# Altium PCB PlacaPrincipal.PcbDoc
Units mil, origin at the board's own origin, x right, y up, seen from the top; angles counter-clockwise.
Board outline 3660.03 x 3280.03 mil, 2 copper layers (Top Layer, Bottom Layer); 43 components, 37 nets, 147 pads, 144 vias.
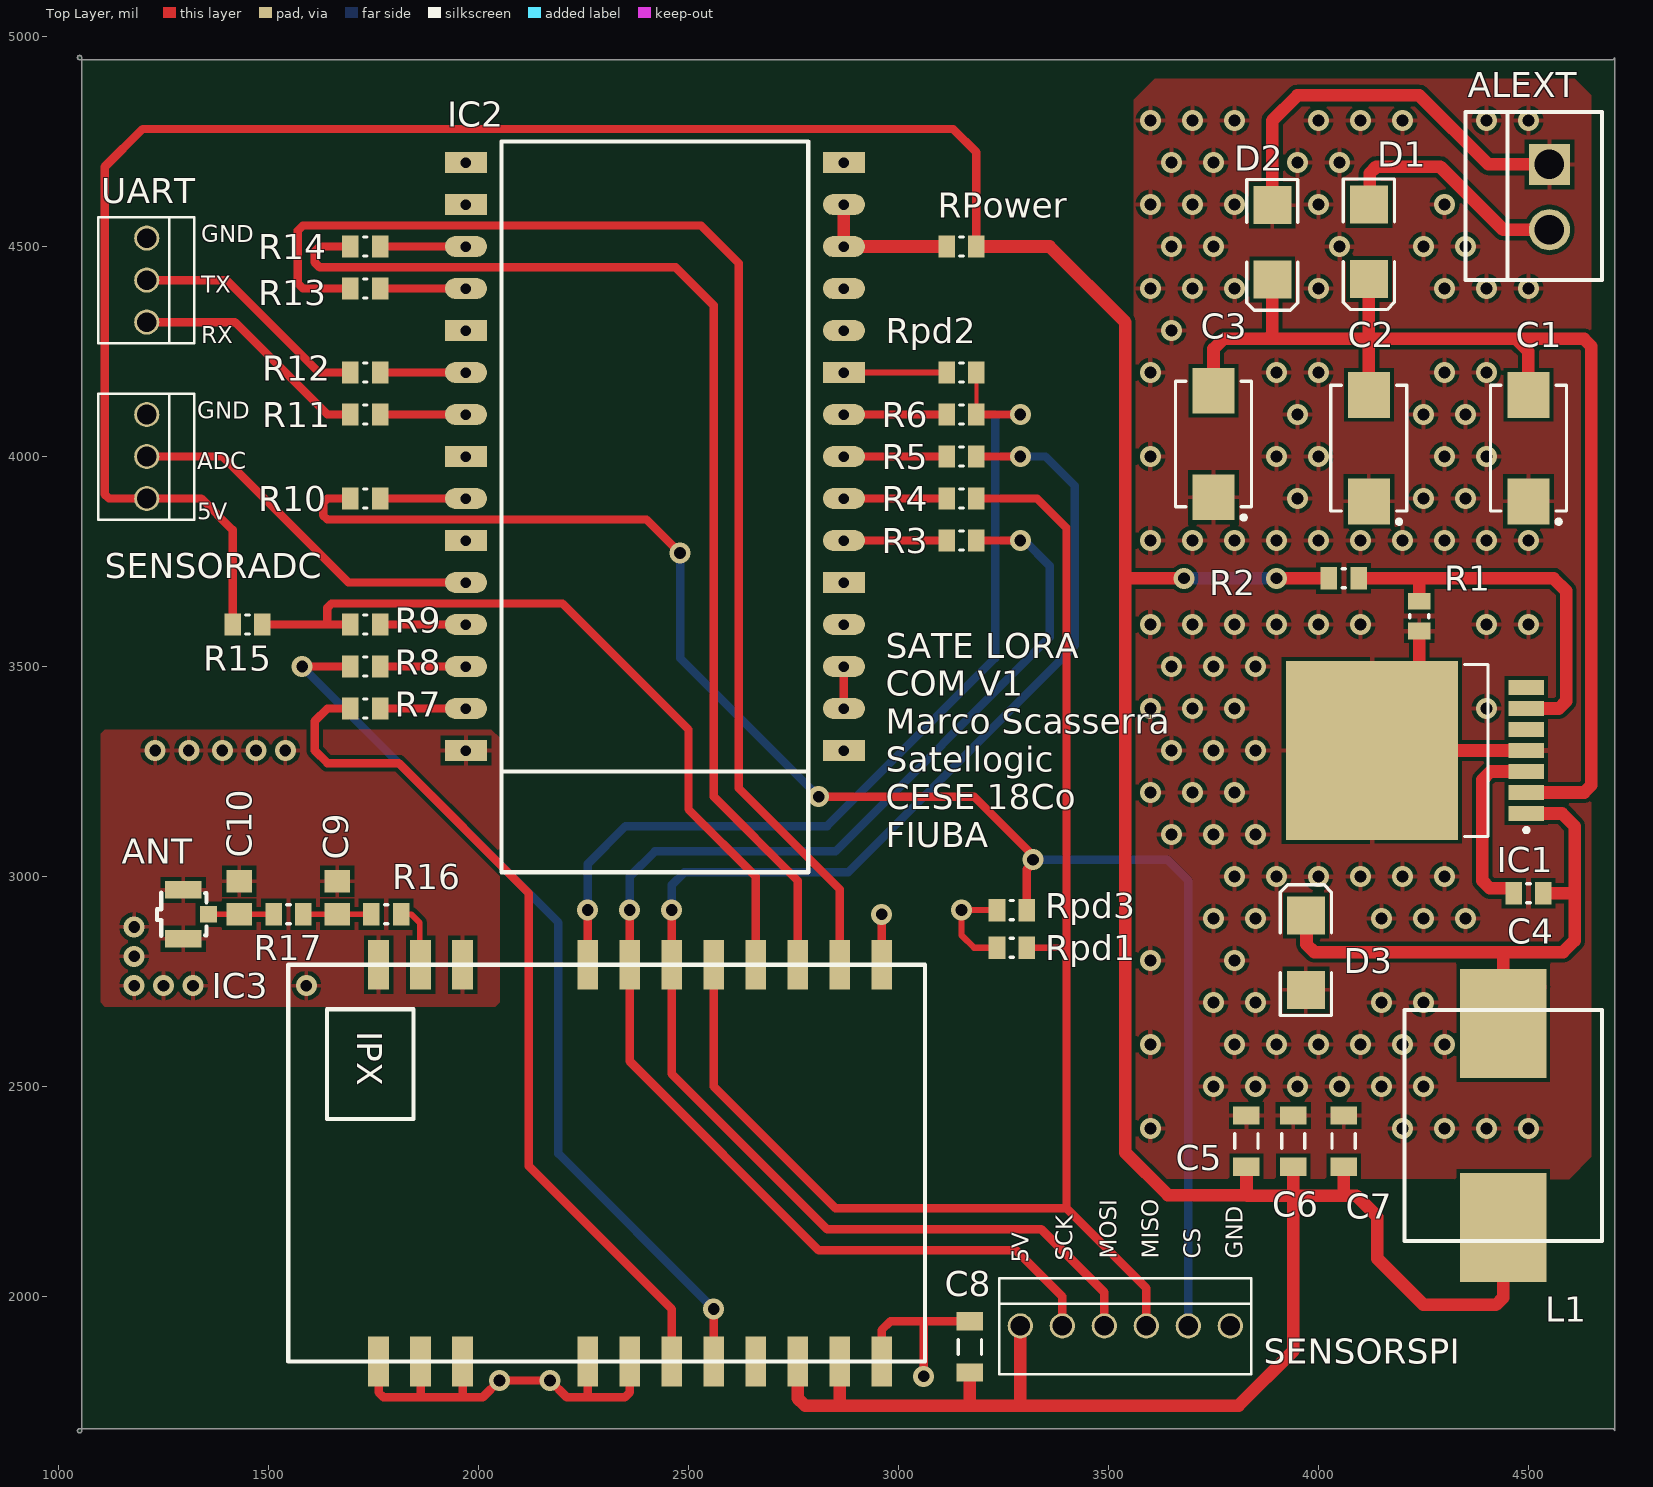
[diagram p0: Top Layer view]
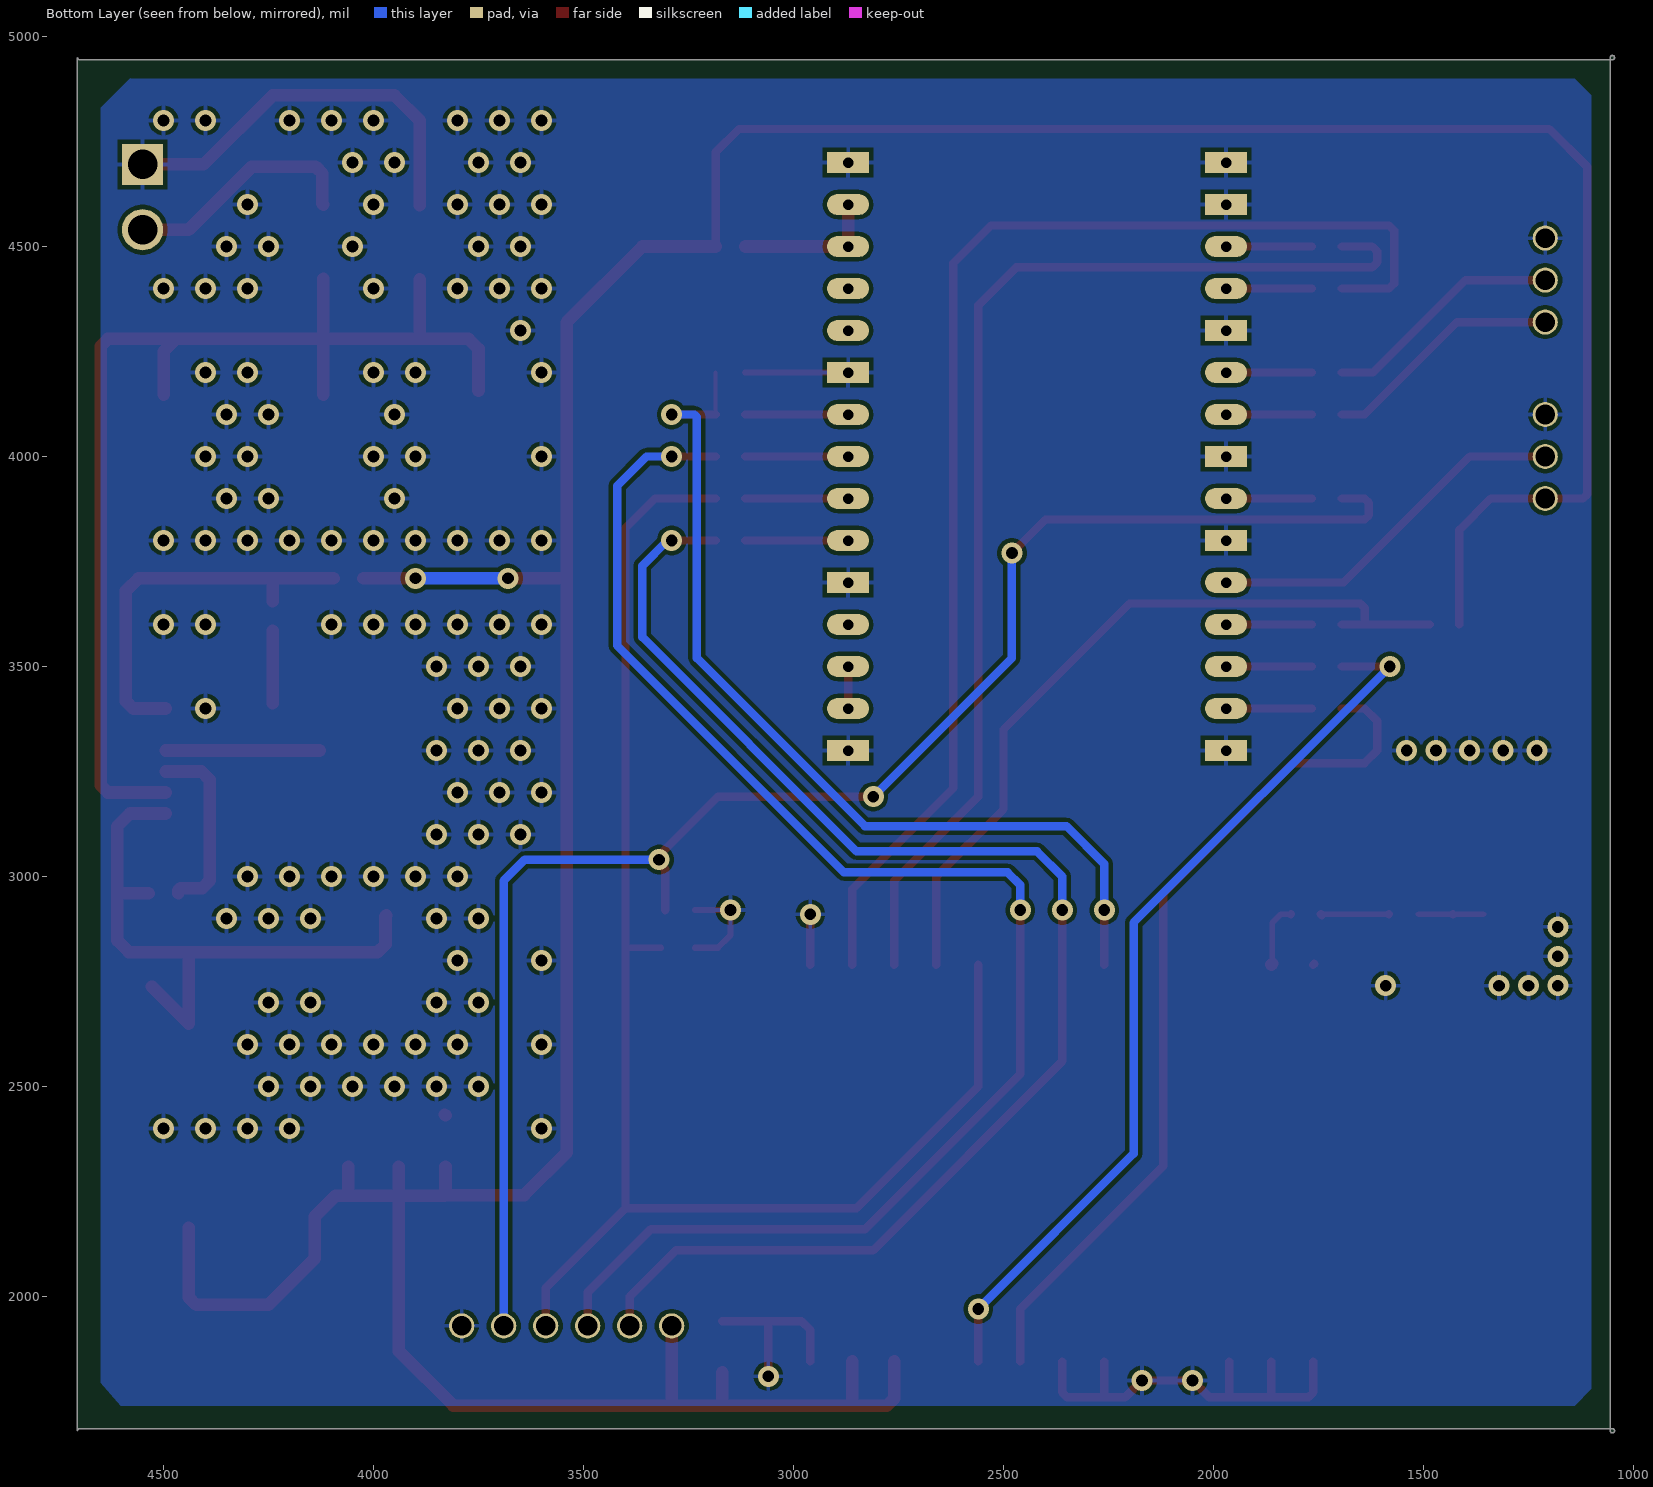
[diagram p1: Bottom Layer view, seen from below]
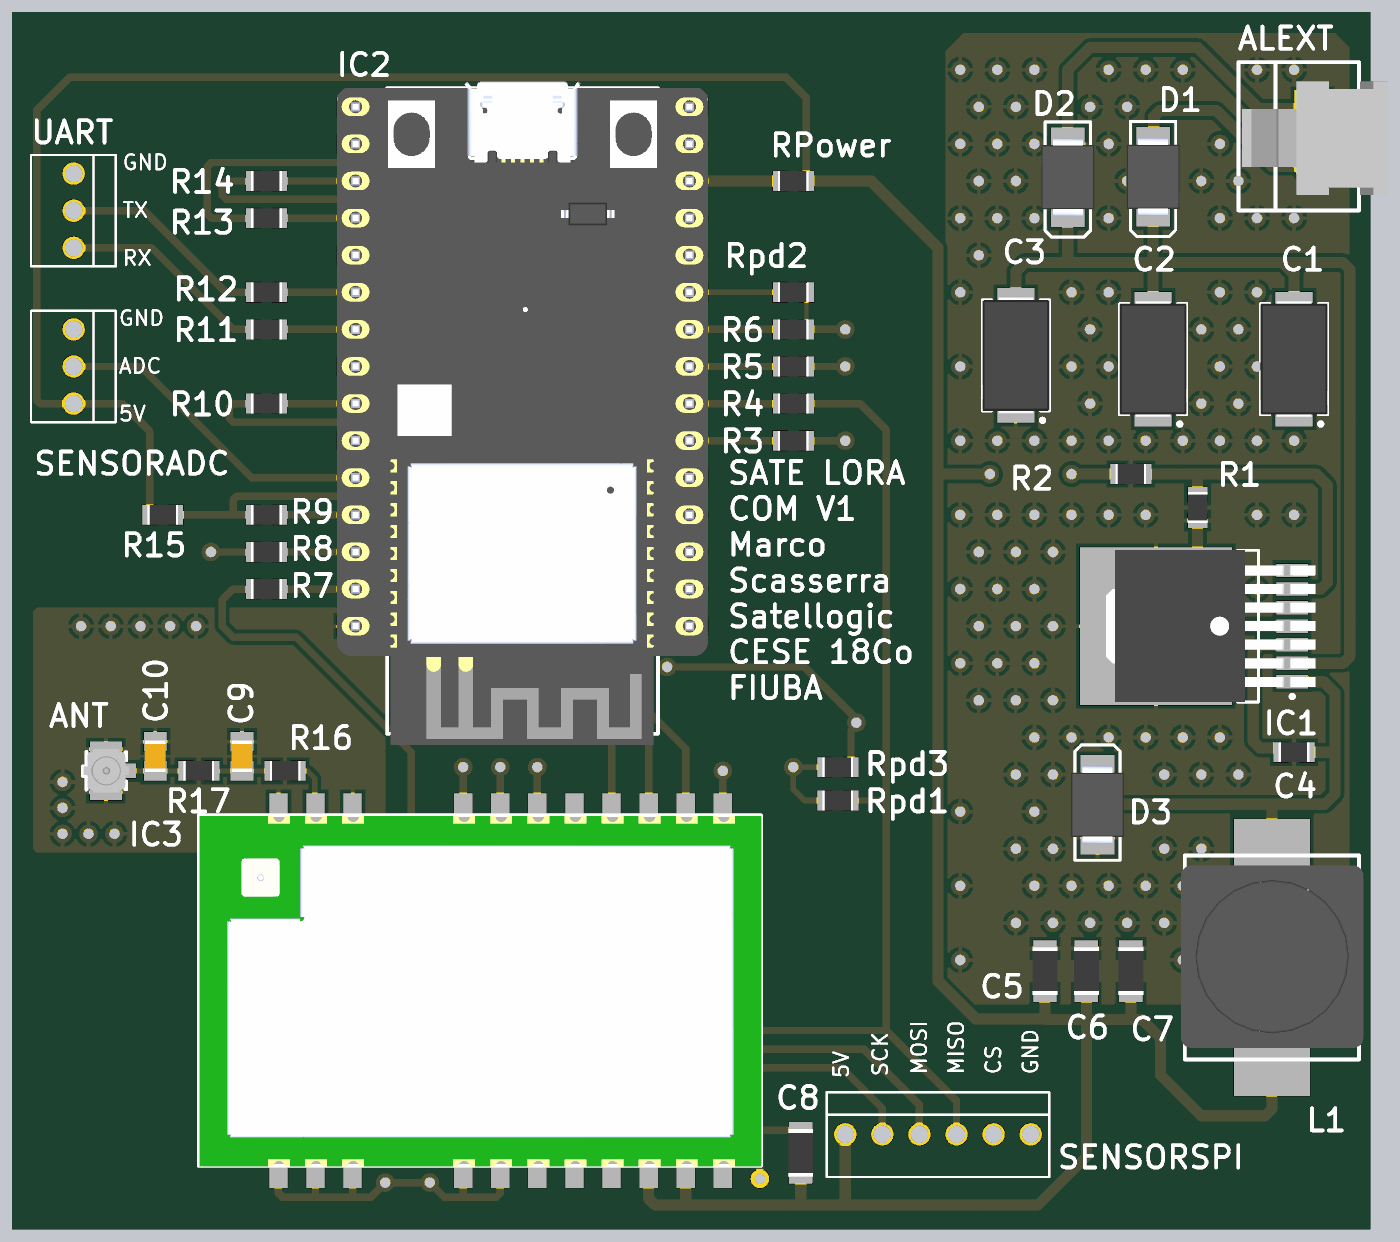
[diagram p2: 3D render of the assembled board from above, using the file's embedded part models]

## Layer stack, top to bottom
Top Solder: solder mask 0.4, Solder Resist, Dk 3.5
Top Layer: signal copper 1.4
Dielectric 1: dielectric 12.6, FR-4, Dk 4.8
Bottom Layer: signal copper 1.4
Bottom Solder: solder mask 0.4, Solder Resist, Dk 3.5

## Board outline
1044.98,1680 cw(c1050,1680) 1050,1685.02 4700,1685.02 cw(c4700,1680) 4705.02,1680 4705.02,4950 cw(c4700,4950) 4700,4944.98 1050,4944.98 cw(c1050,4950) 1044.98,4950 cw(c1050,4950) 1050,4955.02 cw(c1050,4950) 1055.02,4950 1055.02,1680 cw(c1050,1680) 1050,1674.98 cw(c1050,1680)

## Design rules (kind name [scope] priority, off if disabled: settings)
Clearance [All] p1: gap=10 ignorepadtopadclearanceinfootprint=FALSE
MinimumSolderMaskSliver [All] p1: minsoldermaskwidth=3.94
PolygonConnect [All] p1: connectstyle=Relief reliefconductorwidth=10 reliefentries=4 polygonreliefangle="90 Angle" airgapwidth=10
RoutingVias [All] p1: holewidth=28 width=50 viastyle="Through Hole" minholewidth=28 minwidth=50 maxholewidth=28 maxwidth=50
SilkToSolderMaskClearance [IsPad] p1: minsilkscreentomaskgap=5.91 clearancetoexposedcopper=TRUE
SolderMaskExpansion [All] p1: expansion=1.97 istentingtop=FALSE
Width [All] p1: maxlimit=30 minlimit=10 preferedwidth=10 minimp=50.000000 maximp=50.000000 favimp=50.000000
28 further rules are at their usual default settings.

## Classes and differential pairs
component class U_PowerSupply: ALEXT C1 C2 C3 C4 C5 C6 C7 D1 D2 D3 IC1 L1 R1 R2
component class U_LoRaModule: ANT C8 C9 C10 IC3 R15 R16 R17
component class U_Microcontroller: IC2 R3 R4 R5 R6 R7 R8 R9 R10 R11 R12 R13 R14 Rpd1 Rpd2 Rpd3 RPower SENSORADC SENSORSPI UART

## Components (designator, comment, footprint, x,y, rotation, side; value= is the part's Value field where it differs from the comment)
ALEXT "Header 2" "CONN HEADER VERT 2POS 3.96MM" 4550,4695.51 r0 top
ANT "Header 3" "IPEX Board Conn" 1352.09,2705.28 r90 top
C1 "Cap" "KEMET Case D" 4500,4020 r270 top value="47uF 35V"
C2 "Cap" "KEMET Case D" 4120,4020 r270 top value="47uF 35V"
C3 "Cap" "KEMET Case D" 3750,4030 r270 top value="47uF 35V"
C4 "Cap" RES0805 4500,2960 r0 top value=10nF
C5 "Cap" "RES 1206" 3828.58,2370 r270 top value="33uF 16V"
C6 "Cap" "RES 1206" 3940,2370 r270 top value="33uF 16V"
C7 "Cap" "RES 1206" 4060,2370 r270 top value="33uF 16V"
C8 "Cap" "RES 1206" 3170,1880 r270 top value="33uF 16V"
C9 "Cap" CAP0805 1663.69,2949.37 r270 top value=DNP
C10 "Cap" CAP0805 1430,2949.37 r270 top value=DNP
D1 "D Schottky" SMB 4120,4600 r270 top value=B340B-13-F
D2 "D Zener" SMB 3890,4598.58 r270 top value=SMBJ24A
D3 "D Schottky" SMB 3970,2730 r90 top value=B340B-13-F
IC1 "LM2676S-ADJ" DPAK127P1435X464-8N 4250,3300 r180 top
IC2 "ESP32-C3-DevKitC-02" ESP32-C3-DEVKITC-02 2870,3300 r180 top
IC3 "E22-900M30S" E22-900M30S 1547.01,2790 r270 top
L1 "RL-6050" RL-6050 4847,2541 r270 top value=22uH
R1 "Res2" RES0805 4240,3620 r90 top value="1K 1%"
R2 "Res2" RES0805 4060,3710 r180 top value="3K16 1%"
R3 "Res2" RES0805 3150,3800 r180 top value=0R
R4 "Res2" RES0805 3150,3900 r180 top value=0R
R5 "Res2" RES0805 3150,4000 r180 top value=0R
R6 "Res2" RES0805 3150,4100 r180 top value=0R
R7 "Res2" RES0805 1730,3400 r180 top value=0R
R8 "Res2" RES0805 1730,3500 r180 top value=0R
R9 "Res2" RES0805 1730,3600 r180 top value=0R
R10 "Res2" RES0805 1730,3900 r180 top value=0R
R11 "Res2" RES0805 1730,4100 r180 top value=470
R12 "Res2" RES0805 1730,4200 r180 top value=470
R13 "Res2" RES0805 1730,4400 r180 top value=0R
R14 "Res2" RES0805 1730,4500 r180 top value=0R
R15 "Res2" RES0805 1450,3600 r180 top value=10K
R16 "Res2" RES0805 1780,2910 r180 top value=DNP
R17 "Res2" RES0805 1547.38,2910 r180 top value=DNP
Rpd1 "Res2" RES0805 3270,2830 r0 top value=10K
Rpd2 "Res2" RES0805 3150,4200 r0 top value=10k
Rpd3 "Res2" RES0805 3270,2920 r0 top value=10k
RPower "Res2" RES0805 3150,4500 r180 top value=0R
SENSORADC "Header 3" "Conn 1x3P" 1210,4100 r180 top
SENSORSPI "Header 6" "Conn 1x6P" 3290,1930 r270 top
UART "Header 3" "Conn 1x3P" 1210,4520 r180 top

## Footprints (in the part's own frame and the unit in brackets; to place one, negate y for a bottom-side part, rotate by r counter-clockwise, add the part's x,y. Pads: shape width x height; smd on the part's side, far side on the other; paste and mask are expansions set on the pad)
CAP0805 [mm]
  rect 1.35x1.55 smd: 1(-1,0) 2(1,0)
  body extent -1.1,-0.72 1.1,0.72, height 0.88
"Conn 1x3P" [mil] "WAFER, FRICTION LOCK  KK (2.54)/.100 FOR (0.64)/.025 SQ. PINS"
  round 60 hole 46.85: 1(0,0) 2(0,100) 3(0,200)
  silkscreen extent -113,-50 115,250
"Conn 1x6P" [mil] "WAFER, FRICTION LOCK  KK (2.54)/.100 FOR (0.64)/.025 SQ. PINS"
  round 60 hole 46.85: 1(0,0) 2(0,100) 3(0,200) 4(0,300) 5(0,400) 6(0,500)
  silkscreen extent -113,-50 115,550
"CONN HEADER VERT 2POS 3.96MM" [mm] "Connector Header Through Hole 2 position 0.156\" (3.96mm)"
  rect 2.5x2.5 hole 1.778: 1(0,0)
  round 2.5 hole 1.778: 2(0,-3.95)
  silkscreen extent -5.08,-6.98 3.17,3.17, body extent -4.83,-5.92 5.18,1.85, height 14.86
DPAK127P1435X464-8N [mm] "D2-PAK, 8-Pads, Body 7.55x8.57mm (max), IPC Medium Density"
  rect 2.16x0.91 smd: 1(-6.222,3.81) 2(-6.222,2.54) 3(-6.222,1.27) 4(-6.222,0) 5(-6.222,-1.27) 6(-6.222,-2.54) 7(-6.222,-3.81)
  rect 10.41x10.8 smd: 8(3.107,0)
  silkscreen extent -6.35,-5.2 -2.5,5.2, body extent -7.81,-5.2 6.54,5.2, height 4.64
E22-900M30S [mm] "The E22-900M30S is based on the SX1262, a new generation of  LoRaTM RF chip manufactured by Semtech, USA. It is an ultra-small  and self-developed 868MHz?915MHz SMD LoRaTM wireless module"
  rect 3x1.25 smd: 1(24,5.46) 2(24,8) 3(24,10.54) 4(24,18.11) 5(24,20.65) 6(24,23.19) 7(24,25.73) 8(24,28.27) 9(24,30.81) 10(24,33.35) 11(24,35.89) 12(0,35.89) 13(0,33.35) 14(0,30.81) 15(0,28.27) 16(0,25.73) 17(0,23.19) 18(0,20.65) 19(0,18.11) 20(0,10.54) 21(0,8) 22(0,5.46)
  silkscreen extent 0,0 24,38.5, body extent 0.06,0.04 24.06,38.54, height 3.97
ESP32-C3-DEVKITC-02 [mil] "ESP32-C3-DevKitC-02 is an entry-level development board based on ESP32-C3-WROOM-02, a general-purpose module with 4 MB SPI flash. This board integrates complete Wi-Fi and Bluetooth LE functions."
  rect 100x50 hole 25: 1(0,0) 5(0,-400) 10(0,-900) 15(0,-1400) 16(900,0) 21(900,-500) 23(900,-700) 26(900,-1000) 29(900,-1300) 30(900,-1400)
  oval 100x50 hole 25: 2(0,-100) 3(0,-200) 4(0,-300) 6(0,-500) 7(0,-600) 8(0,-700) 9(0,-800) 11(0,-1000) 12(0,-1100) 13(0,-1200) 14(0,-1300) 17(900,-100) 18(900,-200) 19(900,-300) 20(900,-400) 22(900,-600) 24(900,-800) 25(900,-900) 27(900,-1100) 28(900,-1200)
  silkscreen extent 85,-1450 815,290, body extent -50,-1468 950,320, height 295
"IPEX Board Conn" [mm] "1 Inner needle IPEX Board Edge 1.25mm -40?~+90? 6GHz 50O 2mm SMD RF Connectors / Coaxial Connectors ROHS"
  rect 1x1.05 smd paste+0 mask+0.05: 1(5.2,-0.125)
  rect 1.05x2.2 smd paste+0 mask+0.05: 2(3.725,1.4) 3(6.675,1.4)
  silkscreen extent 3.9,0 6.5,2.99, body extent 3.7,-0.17 6.7,2.93, height 1.25
"KEMET Case D" [mm] "Molded Capacitor, 2-Leads, Body 7.30x4.30mm, IPC Medium Density"
  rect 2.77x2.55 smd: 1(-3.22,0) 2(3.22,0)
  silkscreen extent -3.8,-2.3 4.57,2.3, body extent -4.02,-2.3 4.02,2.3, height 3.1
RES0805 [mm]
  rect 1x1.35 smd: 1(-0.9,0) 2(0.9,0)
  silkscreen extent -0.1,-0.58 0.1,0.58, body extent -1.05,-0.67 1.05,0.67, height 0.6
"RES 1206" [mm] "Chip Resistor, 2-Leads, Body 3.10x1.58mm, IPC Medium Density"
  rect 1.1x1.6 smd: 1(-1.55,0) 2(1.55,0)
  silkscreen extent -0.45,-0.7 0.45,0.7, body extent -1.63,-0.85 1.63,0.85, height 0.65
RL-6050 [mil]
  rect 260x205 smd: 1(-109,-407) 2(377,-407)
  silkscreen extent -141,-642 409,-172, body extent -114,-652 378,-160, height 256
SMB [mm]
  rect 2.3x2.3 smd: 1(0,0) 2(4.5,0)
  silkscreen extent -1.55,-1.55 6.35,1.55, body extent -0.42,-1.81 4.92,1.81, height 2.65

## Part data
ALEXT: "Header, 2-Pin", LatestRevisionDate=17-Jul-2002, LatestRevisionNote="Re-released for DXP Platform.", Publisher="Altium Limited"
ANT: "Header, 3-Pin", LCSC Part #=C88374, LatestRevisionDate=17-Jul-2002, LatestRevisionNote="Re-released for DXP Platform.", Publisher="Altium Limited"
C1 C2 C3: "Capacitor", LCSC Part #=C110229, LatestRevisionDate=17-Jul-2002, LatestRevisionNote="Re-released for DXP Platform.", PackageDescription=SMD,D6.3xL5.4mm, PackageReference=SMD,D6.3xL5.4mm, Published=8-Jun-2000, Publisher="Altium Limited"
C4: "Capacitor", LCSC Part #=C1710, LatestRevisionDate=17-Jul-2002, LatestRevisionNote="Re-released for DXP Platform.", PackageDescription=0805, PackageReference=0805, Published=8-Jun-2000, Publisher="Altium Limited"
C5 C6 C7 C8 C9 C10: "Capacitor", LatestRevisionDate=17-Jul-2002, LatestRevisionNote="Re-released for DXP Platform.", PackageDescription=1206, PackageReference=1206, Published=8-Jun-2000, Publisher="Altium Limited"
D1 D3: "B340B-13-F", LCSC Part #=C85099, LatestRevisionDate=17-Jul-2002, LatestRevisionNote="Re-released for DXP Platform.", PackageDescription="DO-214-AA/SMB; 2 C-Bend Leads; Body 5.3 x 3.6 mm, inc. leads (LxW)", PackageReference=SMB, Published=8-Jun-2000, Publisher="Altium Limited"
D2: "SMBJ24A", LCSC Part #=C3018876, LatestRevisionDate=17-Jul-2002, LatestRevisionNote="Re-released for DXP Platform.", PackageDescription="DO-214-AA/SMB; 2 C-Bend Leads; Body 5.3 x 3.6 mm, inc. leads (LxW)", PackageReference=SMB, Published=8-Jun-2000, Publisher="Altium Limited"
IC1: "The LM2676 series of regulators are monolithic / integrated circuits which provide all of the active / functions for a step-down (buck) switching regulator / capable of driving up to 3-A loads with excellent line / and load regulation characteristics.", Datasheet=https://www.ti.com/lit/ds/symlink/lm2676.pdf?HQS=dis-dk-null-digikeymode-dsf-pf-null-wwe&ts=1689865044741&ref_url=https%253A%252F%252Fwww.ti.com%252Fgeneral%252Fdocs%252Fsuppproductinfo.tsp%253FdistId%253D10%2526gotoUrl%253Dhttps%253A%252F%252Fwww.ti.com%252Flit%252Fgpn%252Flm2676
IC2: "ESP32-C3-DevKitC-02 is an entry-level development board based on ESP32-C3-WROOM-02, a general-purpose module with 4 MB SPI flash. This board integrates complete Wi-Fi and Bluetooth LE functions.", Datasheet=https://docs.espressif.com/projects/esp-idf/en/latest/esp32c3/hw-reference/esp32c3/user-guide-devkitc-02.html
IC3: "The E22-900M30S is based on the SX1262, a new generation of / LoRaTM RF chip manufactured by Semtech, USA. It is an ultra-small / and self-developed 868MHz、915MHz SMD LoRaTM wireless module.", Datasheet=https://www.ebyte.com/en/downpdf.aspx?id=453
L1: library part "Inductor Iron", "Magnetic-Core Inductor", LatestRevisionDate=17-Jul-2002, LatestRevisionNote="Re-released for DXP Platform.", PackageDescription="Axial Device, Thru-Hole; 2 Leads; 0.9 in Pin Spacing", PackageReference=AXIAL-0.9, Published=24-Mar-1999, Publisher="Altium Limited"
R1: "Resistor", LCSC Part #=C416040, LatestRevisionDate=17-Jul-2002, LatestRevisionNote="Re-released for DXP Platform.", PackageDescription=0805, PackageReference=0805, Published=8-Jun-2000, Publisher="Altium Limited"
R2: "Resistor", LCSC Part #=C170878, LatestRevisionDate=17-Jul-2002, LatestRevisionNote="Re-released for DXP Platform.", PackageDescription=0805, PackageReference=0805, Published=8-Jun-2000, Publisher="Altium Limited"
R3 R4 R5 R6 R7 R8 R9 R10 R11 R12 R13 R14 Rpd1 Rpd2 Rpd3 RPower: "Resistor", LCSC Part #=C2074219, LatestRevisionDate=17-Jul-2002, LatestRevisionNote="Re-released for DXP Platform.", PackageDescription=0805, PackageReference=0805, Published=8-Jun-2000, Publisher="Altium Limited"
R15: "Resistor", LCSC Part #=C2930231, LatestRevisionDate=17-Jul-2002, LatestRevisionNote="Re-released for DXP Platform.", PackageDescription=0805, PackageReference=0805, Published=8-Jun-2000, Publisher="Altium Limited"
R16 R17: "Resistor", LatestRevisionDate=17-Jul-2002, LatestRevisionNote="Re-released for DXP Platform.", PackageDescription=0805, PackageReference=0805, Published=8-Jun-2000, Publisher="Altium Limited"
SENSORADC UART: "Header, 3-Pin", LatestRevisionDate=17-Jul-2002, LatestRevisionNote="Re-released for DXP Platform.", Publisher="Altium Limited"
SENSORSPI: "Header, 6-Pin", LatestRevisionDate=17-Jul-2002, LatestRevisionNote="Re-released for DXP Platform.", Publisher="Altium Limited"

## Via types
v1: diameter 50, hole 28, Top Layer to Bottom Layer, tented both sides, 143 vias
v2: diameter 50, hole 28, Top Layer to Bottom Layer, 1 vias

## Nets (pads, with @x,y where several pads share a name; then routed paths per layer and width w, separated by ;. In a path a pad name is that pad's centre, name@x,y a point inside that pad or via, vN(x,y) a via of type N, cw(c..) or ccw(c..) an arc to the next point about the centre after c; other vN are vias at no path point)
5V: C5.2 C6.2 C7.2 C8.2 IC3.9 IC3.10 L1.2 R2.2 R15.2 RPower.1 SENSORADC.3 SENSORSPI.1 | length 10157
  Top Layer w20: R15.2 1414.57,3825.43 1340,3900 SENSORADC.3 1120,3900 1110,3910 1110,4690 1200,4780 3130,4780 3185.43,4724.57 RPower.1
  Top Layer w30: IC3.9 2760,1757.57 2777.57,1740 2860,1740 ; IC3.10 2860,1740 ; C8.2 3170,1740 ; RPower.1 3360,4500 3540,4320 3540,3710 ; SENSORSPI.1 3290,1740 ; v1(3680,3710) 3540,3710 ; C5.2 3828.58,2241.42 ; v1(3900,3710) R2.2 ; C6.2 3940,2240 ; C7.2 4060,2240 ; L1.2 4440,1997.57 4422.43,1980 4250,1980 4240.01,1989.99 4140,2090 4140,2190 4090,2240 4060,2240 ; 2860,1740 3170,1740 ; 3170,1740 3290,1740 ; 3290,1740 3810,1740 3940,1870 3940,2240 ; 3540,3710 3540,2342.83 3641.42,2241.42 3828.58,2241.42 ; 3828.58,2241.42 3830,2240 3940,2240 ; 3940,2240 4060,2240
  Bottom Layer w30: v1(3680,3710) v1(3900,3710)
ADC: IC2.20 SENSORADC.2 | length 884.3
  Top Layer w20: SENSORADC.2 1390,4000 1690,3700 IC2.20
ANT: IC3.21 R16.1 | length 153.7
  Top Layer w13.75: R16.1 1840,2910 1860,2890 IC3.21@1860,2791.97
  Top Layer w30: IC3.21@1860,2791.97 IC3.21
BUSY: IC3.14 R14.2 | length 2760.6
  Top Layer w20: R14.2 1621.72,4500 1610,4488.28 1610,4462.37 1621.72,4450.65 2469.35,4450.65 2560,4360 2560,3190 2760,2990 IC3.14
CSE22: IC3.19 R6.1 Rpd2.2 | length 2254.1
  Top Layer w10: R6.1 Rpd2.2
  Top Layer w20: IC3.19 v1(2260,2920) ; R6.1 v1(3290,4100)
  Bottom Layer w20: v1(2260,2920) 2260,3030 2350,3120 2830,3120 3230,3520 3230,4094.14 3235.86,4100 v1(3290,4100)
CSSensor: R10.2 Rpd3.2 SENSORSPI.5 | length 3851.6
  Top Layer w20: R10.2 1640,3900 1630,3890 1630,3860 1640,3850 2400,3850 v1(2480,3770) ; v1(2810,3190) 3180,3190 v1@3330,3040 ; Rpd3.2 3305.43,3017.32 3320,3031.88 v1(3320,3040)
  Bottom Layer w20: v1(2480,3770) 2480,3520 v1(2810,3190) ; v1@3330,3040 3640,3040 3690,2990 SENSORSPI.5
DIO1: IC3.13 R13.2 | length 3117.5
  Top Layer w20: R13.2 1581.72,4400 1570,4411.72 1570,4538.28 1581.72,4550 2530,4550 2620,4460 2620,3210 2860,2970 IC3.13
GND: ALEXT.1 ANT.2 ANT.3 C1.2 C2.2 C3.2 C5.1 C6.1 C7.1 C8.1 C9.1 C10.1 D2.1 D3.1 IC1.4 IC1.8 IC2.1 IC2.5 IC2.10 IC2.15 IC2.16 IC2.21 IC2.23 IC2.26 IC2.29 IC2.30 IC3.1 IC3.2 IC3.3 IC3.4 IC3.5 IC3.11 IC3.12 IC3.20 IC3.22 R1.1 Rpd1.1 Rpd2.1 Rpd3.1 SENSORADC.1 SENSORSPI.6 UART.1 | length 3574.1
  Top Layer w15: IC2.10 Rpd2.1 ; Rpd1.1 3180,2830 3150,2860 v1(3150,2920) Rpd3.1
  Top Layer w20: IC3.22@1760,2791.97 IC3.22 ; IC3.1 1761.97,1771.72 1773.68,1760 1860,1760 ; IC3.2 1861.97,1761.97 1860,1760 ; IC3.3 1961.97,1761.97 1960,1760 ; IC3.4 2260,1760 ; IC3.5 2360,1771.72 2348.28,1760 2260,1760 ; IC3.11 2960,1920 2981.02,1941.02 3060,1941.02 ; IC3.12 v1(2960,2910) ; v2(3060,1810) 3060,1941.02 ; C8.1 3060,1941.02 ; 1860,1760 1960,1760 ; 1960,1760 2010,1760 v1(2050,1800) v1(2170,1800) 2210,1760 2260,1760
  Top Layer w30: C5.1 C5.1@3830,2432.44 ; D2.1 3890,4800 3950,4860 4240,4860 4404.49,4695.51 ALEXT.1 ; IC1.8 IC1.4 ; IC1.8@4240,3412.34 R1.1
  other v1: 3600,2400 4200,2400 4300,2400 4400,2400 4500,2400 3750,2500 3850,2500 3950,2500 4050,2500 4150,2500 4250,2500 3600,2600 3800,2600 3900,2600 4000,2600 4100,2600 4200,2600 4300,2600 3750,2700 3850,2700 4150,2700 4250,2700 1180,2740 1250,2740 1320,2740 1590,2740 3600,2800 3800,2800 1180,2810 1180,2880 3750,2900 3850,2900 4150,2900 4250,2900 4350,2900 3800,3000 3900,3000 4000,3000 4100,3000 4200,3000 4300,3000 3650,3100 3750,3100 3850,3100 3600,3200 3700,3200 3800,3200 1230,3300 1310,3300 1390,3300 1470,3300 1540,3300 3650,3300 3750,3300 3850,3300 3600,3400 3700,3400 3800,3400 4400,3400 3650,3500 3750,3500 3850,3500 3600,3600 3700,3600 3800,3600 3900,3600 4000,3600 4100,3600 4400,3600 4500,3600 3600,3800 3700,3800 3800,3800 3900,3800 4000,3800 4100,3800 4200,3800 4300,3800 4400,3800 4500,3800 3950,3900 4250,3900 4350,3900 3600,4000 3900,4000 4000,4000 4300,4000 4400,4000 3950,4100 4250,4100 4350,4100 3600,4200 3900,4200 4000,4200 4300,4200 4400,4200 3650,4300 3600,4400 3700,4400 3800,4400 4000,4400 4300,4400 4400,4400 4500,4400 3650,4500 3750,4500 4050,4500 4250,4500 4350,4500 3600,4600 3700,4600 3800,4600 4000,4600 4300,4600 3650,4700 3750,4700 3950,4700 4050,4700 3600,4800 3700,4800 3800,4800 4000,4800 4100,4800 4200,4800 4400,4800 4500,4800
MISO: IC3.16 R4.1 Rpd1.2 SENSORSPI.4 | length 3557
  Top Layer w15: Rpd1.2@3315.43,2830 3400,2830
  Top Layer w20: IC3.16 2560,2500 2850,2210 3400,2210 ; R4.1 3330,3900 3400,3830 3400,2830 3400,2210 ; SENSORSPI.4 3590,2020 3400,2210
MOSI: IC3.17 R5.1 SENSORSPI.3 | length 3615.1
  Top Layer w20: v1(2460,2920) IC3.17 2460,2530 2830,2160 3340,2160 3490,2010 SENSORSPI.3 ; R5.1 v1(3290,4000)
  Bottom Layer w20: v1(2460,2920) 2460,2980 2490,3010 2880,3010 3420,3550 3420,3930 3350,4000 v1(3290,4000)
NetALEXT_2: ALEXT.2 D1.1 | length 571.8
  Top Layer w30: D1.1 4121.72,4601.72 4121.72,4674.14 4137.57,4690 4290,4690 4440,4540 ALEXT.2
NetANT_1: ANT.1 C10.2 R17.2 | length 155
  Top Layer w13.75: ANT.1 C10.2 R17.2
NetC1_1: C1.1 C2.1 C3.1 D1.2 D2.2 IC1.2 | length 2791.2
  Top Layer w30: C3.1 3750,4256.57 3773.43,4280 3880,4280 ; D2.2 3890,4290 3880,4280 ; C2.1 4120,4280 ; D1.2 4120,4280 ; IC1.2 4632.43,3200 4650,3217.57 4650,4262.43 4632.43,4280 4470,4280 ; C1.1 4500,4250 4470,4280 ; 3880,4280 4120,4280 ; 4120,4280 4470,4280
NetC4_1: C4.1 IC1.3 | length 444.3
  Top Layer w30: C4.1 4464.57,2966.89 4459.88,2971.57 4408.43,2971.57 4390,2990 4390,3230 4410,3250 IC1.3
NetC4_2: C4.2 D3.2 IC1.1 L1.1 | length 1475.1
  Top Layer w30: D3.2 3971.42,2905.75 3971.42,2838.58 3990,2820 4582.5,2820 4610,2847.5 4610,2960 ; 4440,2800 L1.1 L1.1@4527.5,2737.5 ; IC1.1 4580,3150 4610,3120 4610,2960 ; C4.2 4610,2960
NetC9_2: C9.2 R16.2 R17.1 | length 164.5
  Top Layer w13.75: R17.1 R16.2
  Top Layer w20: R16.2@1742.6,2908.03 R16.2
NetIC1_6: IC1.6 R1.2 R2.1 | length 926.3
  Top Layer w30: R2.1 4240,3710 ; R1.2 4240,3710 ; IC1.6 4572.43,3400 4590,3417.57 4590,3680 4560,3710 4240,3710
NetIC2_6: IC2.6 R3.2 | length 244.6
  Top Layer w20: IC2.6 R3.2
NetIC2_7: IC2.7 R4.2 | length 244.6
  Top Layer w20: IC2.7 R4.2
NetIC2_8: IC2.8 R5.2 | length 244.6
  Top Layer w20: IC2.8 R5.2
NetIC2_9: IC2.9 R6.2 | length 244.6
  Top Layer w20: IC2.9 R6.2
NetIC2_13: IC2.13 IC2.14 RPower.2 | length 344.6
  Top Layer w30: IC2.14 IC2.13 RPower.2
NetIC2_17: IC2.17 R7.1 | length 204.6
  Top Layer w20: R7.1 IC2.17
NetIC2_18: IC2.18 R8.1 | length 204.6
  Top Layer w20: R8.1 IC2.18
NetIC2_19: IC2.19 R9.1 | length 204.6
  Top Layer w20: R9.1 IC2.19
NetIC2_22: IC2.22 R10.1 | length 204.6
  Top Layer w20: R10.1 IC2.22
NetIC2_24: IC2.24 R11.1 | length 204.6
  Top Layer w20: R11.1 IC2.24
NetIC2_25: IC2.25 R12.1 | length 204.6
  Top Layer w20: R12.1 IC2.25
NetIC2_27: IC2.27 R13.1 | length 204.6
  Top Layer w20: R13.1 IC2.27
NetIC2_28: IC2.28 R14.1 | length 204.6
  Top Layer w20: R14.1 IC2.28
NRST: IC3.15 R9.2 R15.1 | length 1863.8
  Top Layer w20: R15.1 1640,3600 ; R9.2 1640,3600 ; IC3.15 2660,3000 2500,3160 2500,3350 2200,3650 1650,3650 1640,3640 1640,3600
RXEn: IC3.6 R7.2 | length 2073.5
  Top Layer w20: R7.2 1640,3400 1610,3370 1610,3300 1640,3270 1810,3270 2120,2960 2120,2310 2460,1970 IC3.6
SCK: IC3.18 R3.1 SENSORSPI.2 | length 3377.5
  Top Layer w20: v1(2360,2920) IC3.18 2360,2560 2810,2110 3280,2110 3390,2000 SENSORSPI.2 ; R3.1 v1(3290,3800)
  Bottom Layer w20: v1(2360,2920) 2360,3000 2420,3060 2850,3060 3360,3570 3360,3740 3300,3800 v1(3290,3800)
TXEn: IC3.7 R8.2 | length 2175.4
  Top Layer w20: v1(1580,3500) R8.2 ; IC3.7 v1(2560,1970)
  Bottom Layer w20: v1(1580,3500) 2190,2890 2190,2340 v1(2560,1970)
UARTRX: R11.2 UART.3 | length 575.7
  Top Layer w20: UART.3 1420,4320 1640,4100 R11.2
UARTTX: R12.2 UART.2 | length 575.7
  Top Layer w20: UART.2 1400,4420 1620,4200 R12.2
VCC: IC2.2 IC2.3 | length 100
  Top Layer w20: IC2.2 IC2.3
pads on no net: IC1.5 IC1.7 IC2.4 IC2.11 IC2.12 IC3.8

## Polygon pours and split planes (outlines as drawn)
GND on Top Layer "GND_L01_P005" (solid, pour order 5): 2040,2690 2050,2700 2050,3330 2030,3350 1110,3350 1100,3340 1100,2700 1110,2690
GND on Top Layer "GND_L01_P002" (solid, pour order 2): 3560,4850 3609.72,4899.72 4610.28,4899.72 4650,4860 4650,2332.66 4596.78,2279.44 3560,2280
GND on Bottom Layer "GND_L02_P000" (solid, pour order 0): 1100,4860 1140,4900 4579.18,4900.82 4650,4830 4650,1794.2 4602.3,1739.82 1140.31,1739.69 1100,1780

## Silkscreen, mask and mechanical layers (free items; w line width, h text height)
Top Overlay:
  text "GND /  / TX /  / RX" at 1340,4270 h40
  text "GND /  / ADC /  / 5V" at 1330,3850 h40
  text "SATE LORA / COM V1 / Marco Scasserra / Satellogic / CESE 18Co / FIUBA" at 2970,3070 h60
  text "MOSI" at 3520,2090 h40 r90
  text "MISO" at 3620,2090 h40 r90
  text "CS" at 3720,2090 h40 r90
  text "GND" at 3820,2090 h40 r90
  text "SCK" at 3415,2085 h40 r90
  text "5V" at 3310,2080 h40 r90
Mechanical 1:
  lines w10: 1050,1680 1050,4950 4700,4950 4700,1680 1050,1680

## Dimensions
1050,4950 to 4700,4950 on Mechanical 13
4700,4950 to 4700,1680 on Mechanical 13

## Text inside footprints (layer, text, board x,y; h text height)
IC3: Top Overlay "IPX" at 1711.34,2631.97 h60 r270